# EAGLE board uUSB breakout v1 (EAGLE 7.3.0)
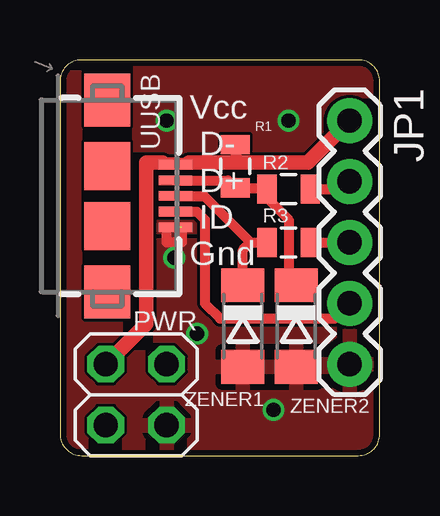
[diagram p0: board, top side]
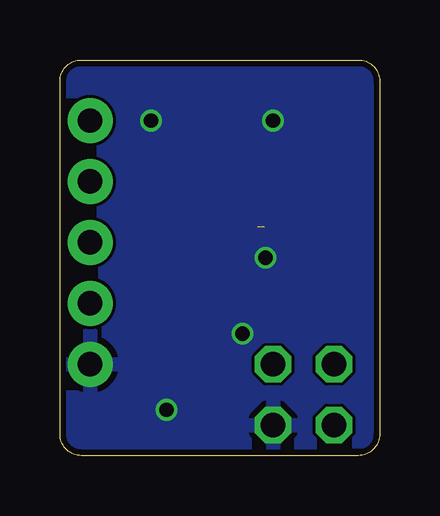
[diagram p1: board, bottom side, seen from below]

Size 13.32 x 16.5 mm. Coordinates in mm from the lower left corner, seen from the top.
Outline: 13.32,0.89 13.32,15.62 arc90 12.44,16.5 0.89,16.5 arc90 0,15.61 0,0.9 arc90 0.9,0 12.43,0 arc90 13.32,0.89
Copper layers (1*16): Top 0.035mm / dielectric 1.5mm / Bottom 0.035mm
Design rules "dirt_cheap_dirty_boards.v1": minimum track width 5mil, minimum drill 12mil, track to track 5mil, track to pad 5mil, pad to pad 5mil, via to via 5mil, smd to smd 0mil, copper to edge 10mil, drill to drill 10mil, minimum pad ring 10mil, minimum via ring 6mil, stop-mask expansion 2mil, vias tented up to drill 25mil, thermal gap 10mil

## Footprints (pad centres in the part's own frame; a part is rotated, then mirrored left to right if it is on the bottom)
1X05 = drill 1.016 pad 1.88: 1 0,0; 2 2.54,0; 3 5.08,0; 4 7.62,0; 5 10.16,0
2X02 = drill 1.016 octagon: 1 -1.27,-1.27; 2 -1.27,1.27; 3 1.27,-1.27; 4 1.27,1.27
0805 = smd 0.8 x 1.2: 1 -0.9,0; 2 0.9,0
USB-AB-MICRO-SMD = smd 1.4 x 0.4: D+ 2.85,0; D- 2.85,0.65; GND 2.85,-1.3; ID 2.85,-0.65; VBUS 2.85,1.3 | smd 1.9 x 2: P$6 0,1.25; P$7 0,-1.25 | smd 1.9 x 2.2: P$8 0,4; P$9 0,-4
SOD80C = smd 1.4 x 1.8: A 1.7,0; C -1.7,0

## Placement (x,y rotation side)
JP1  [1X05]  12.06,13.97 270 top
PWR  [2X02]  3.17,2.54 270 top
R1  1.5k  [0805]  7.3,12.06 90 top
R2  68  [0805]  9.53,11.11 0 top
R3  68  [0805]  9.53,8.89 0 top
UUSB  [USB-AB-MICRO-SMD]  1.97,10.83 0 top
ZENER1  3.6V  [SOD80C]  7.62,5.4 270 top
ZENER2  3.6V  [SOD80C]  9.84,5.4 270 top

## Library data of the parts
JP1 UUSB = SparkFun-Connectors
PWR = pinhead
R1-R3 = SparkFun-Passives
ZENER1 ZENER2 = diode

## Nets
D-: R1.1 R2.1 UUSB.D- ZENER2.C
GND: JP1.5 PWR.4 UUSB.GND ZENER1.A ZENER2.A
ID: JP1.4 UUSB.ID
N$1: JP1.2 R2.2
N$2: JP1.3 R3.2
N$3: R3.1 UUSB.D+ ZENER1.C
VCC: JP1.1 PWR.1 R1.2 UUSB.VBUS

## Tracks (layer width: path | path; a pad name or v marks a point on that pad's centre or on a via)
D-
  Top 0.406: UUSB.D- 6.99,11.48 R1.1 8.57,11.17 R2.1 8.62,10.74 9.53,9.84 9.53,7.42 ZENER2.C
GND  (via drill 0.6)  (1 unrouted)
  Top 0.406: 5.08,9.53 5.08,8.89 4.45,8.89 4.45,9.53
  other vias: 8.89,1.91 9.53,13.97 4.76,8.26 5.71,5.08 4.45,13.97
  pour Top: 0,16.51 0,0 13.34,0 13.34,16.51
  pour Bottom: 0,16.51 0,0 13.34,0 13.34,16.51
ID
  Top 0.406: UUSB.ID 5.7,10.18 6.03,9.84 6.03,6.35 6.67,5.71 11.43,5.71 JP1.4
N$1
  Top 0.406: R2.2 11.75,11.11 JP1.2
N$2
  Top 0.406: R3.2 JP1.3
N$3
  Top 0.406: UUSB.D+ 6,10.83 7.94,8.89 | 7.94,8.89 R3.1 | ZENER1.C 7.62,8.57 7.94,8.89
VCC
  Top 0.406: 5.37,12.22 4.92,12.22 UUSB.VBUS 4.82,12.22 4.29,12.22 | R1.2 7.3,12.54 7.62,12.22
  Top 0.61: JP1.1 10.32,12.22 7.62,12.22 5.37,12.22 | PWR.1 3.59,5.49 3.59,12.22 4.29,12.22

## Text on the board
tNames: Vcc / D- / D+ / ID / Gnd